# Altium PCB 3d Printer Control PCB.PcbDoc
Units mil, origin at the board's own origin, x right, y up, seen from the top; angles counter-clockwise.
Board outline 6000 x 4000 mil, 2 copper layers (Top Layer, Bottom Layer); 30 components, 35 nets, 131 pads, 45 vias.
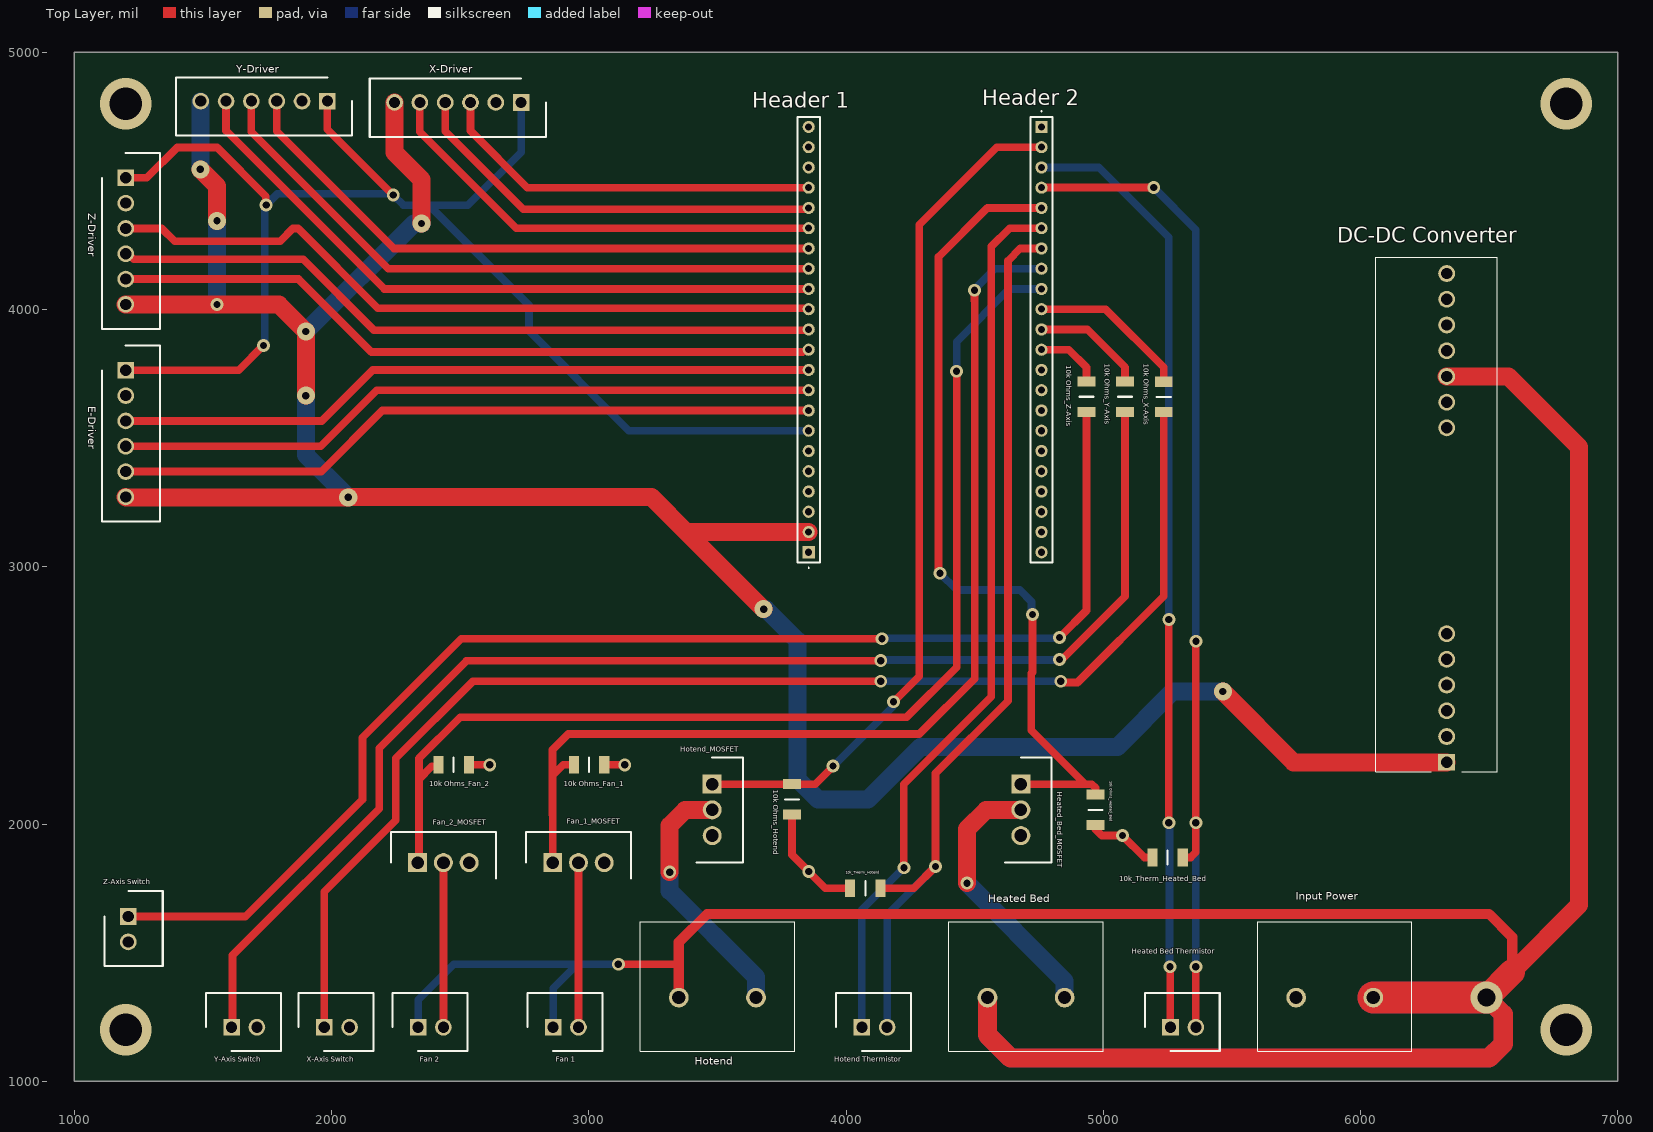
[diagram p0: Top Layer view]
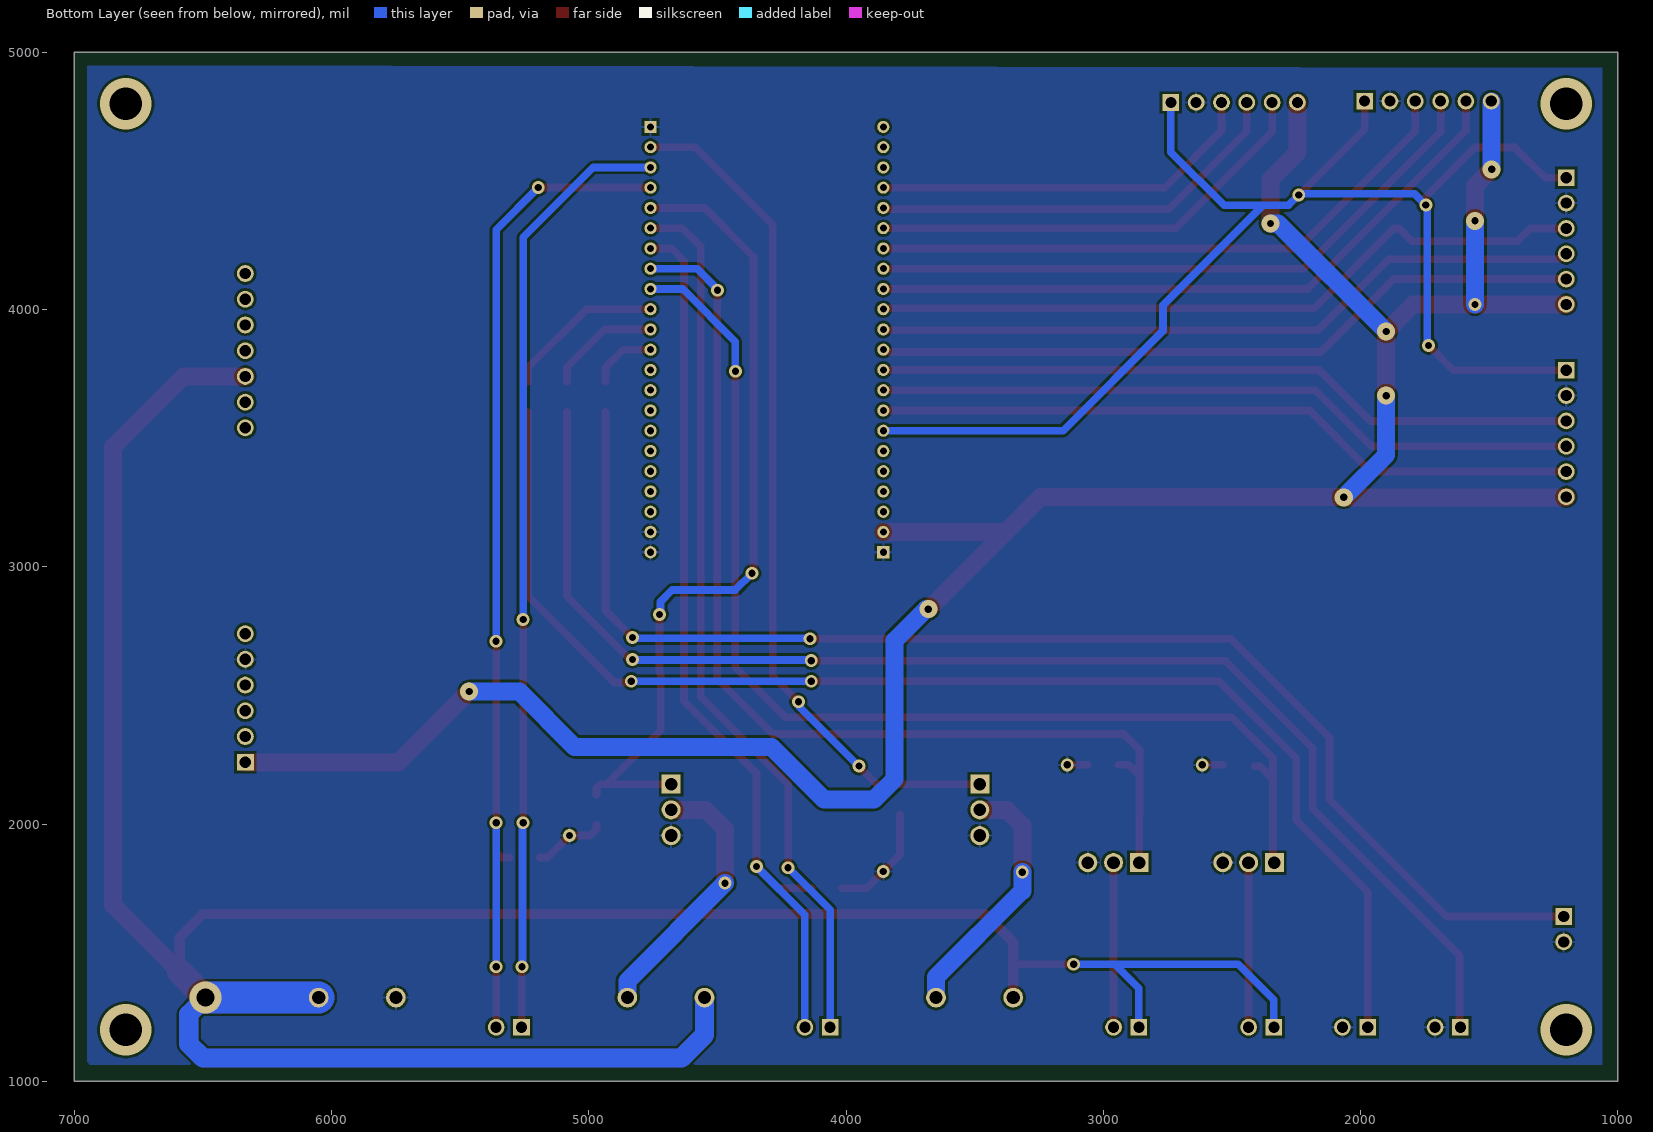
[diagram p1: Bottom Layer view, seen from below]
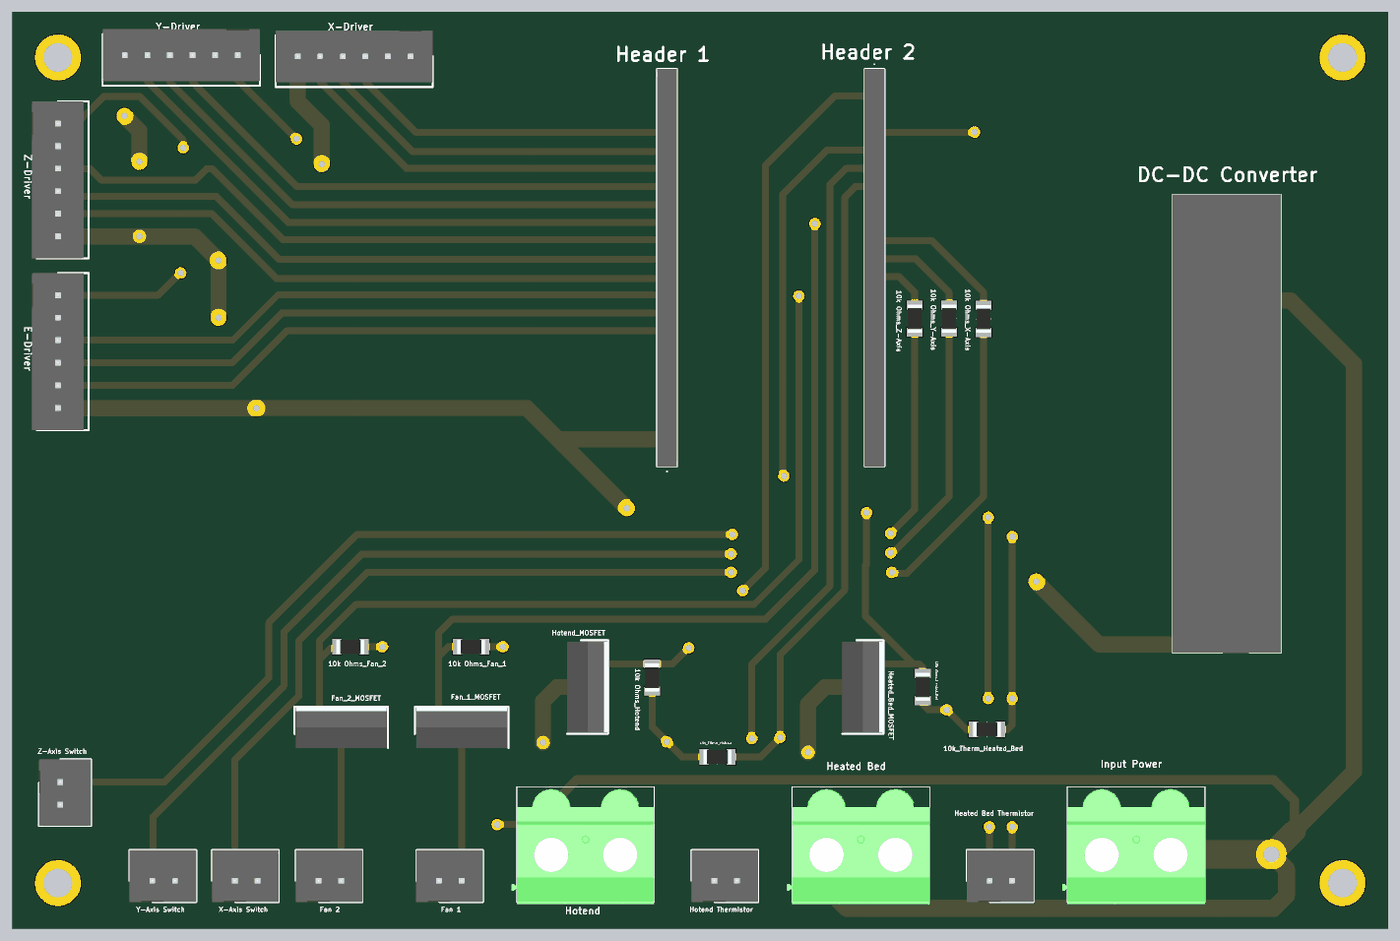
[diagram p2: 3D render of the assembled board from above, using the file's embedded part models]

## Layer stack, top to bottom
Top Solder: solder mask 0.4, Solder Resist, Dk 3.5
Top Layer: signal copper 1.4
Dielectric 1: dielectric 12.6, FR-4, Dk 4.8
Bottom Layer: signal copper 1.4
Bottom Solder: solder mask 0.4, Solder Resist, Dk 3.5

## Board outline
1000,1000 7000,1000 7000,5000 1000,5000

## Design rules (kind name [scope] priority, off if disabled: settings)
Clearance [All] p1: gap=10 ignorepadtopadclearanceinfootprint=FALSE
Height [All] p1: minheight=0 maxheight=99999 prefheight=0
HoleSize [All] p1: absolutevalues=TRUE maxlimit=200 minlimit=1 maxpercent=80.000 minpercent=20.000
PolygonConnect [All] p1: connectstyle=Relief reliefconductorwidth=10 reliefentries=4 polygonreliefangle="90 Angle" airgapwidth=10
RoutingVias [All] p1: holewidth=28 width=50 viastyle="Through Hole" minholewidth=28 minwidth=50 maxholewidth=28 maxwidth=50
SilkToSilkClearance [All] p1: silktosilkclearance=1
SolderMaskExpansion [All] p1: expansion=4 istentingtop=FALSE
Width [All] p1: maxlimit=125 minlimit=10 preferedwidth=10 minimp=50.000000 maximp=50.000000 favimp=50.000000
27 further rules are at their usual default settings.

## Classes and differential pairs
component class "U_Power Distribution": "DC-DC Converter"
component class "U_MCU Board": "10k Ohms_X-Axis" "10k Ohms_Y-Axis" "10k Ohms_Z-Axis" "Header 1" "Header 2"
component class "U_Hotend Fan 2": "10k Ohms_Fan_2" Fan_2_MOSFET
component class "U_Hotend Fan 1": "10k Ohms_Fan_1" Fan_1_MOSFET
component class "U_Hotend Controller": "10k Ohms_Hotend" Hotend_MOSFET
component class "U_Heated Bed Controller": "10k Ohms_Heated_Bed" Heated_Bed_MOSFET
component class "Overall Design": 10k_Therm_Heated_Bed 10k_THerm_Hotend E-Driver "Fan 1" "Fan 2" "Heated Bed" "Heated Bed Thermistor" Hotend "Hotend Thermistor" "Input Power" "X-Axis Switch" X-Driver "Y-Axis Switch" Y-Driver "Z-Axis Switch" Z-Driver

## Components (designator, comment, footprint, x,y, rotation, side; value= is the part's Value field where it differs from the comment)
"10k Ohms_Fan_1" "RC1206FR-7W10KL" RESC3116X65N 3000.94,2230 r180 top
"10k Ohms_Fan_2" "RC1206FR-7W10KL" RESC3116X65N 2475,2230 r180 top
"10k Ohms_Heated_Bed" "RC1206FR-7W10KL" RESC3116X65N 4970,2055 r90 top
"10k Ohms_Hotend" "RC1206FR-7W10KL" RESC3116X65N 3790,2095.94 r90 top
"10k Ohms_X-Axis" "RC1206FR-7W10KL" RESC3116X65N 5235,3660 r90 top
"10k Ohms_Y-Axis" "RC1206FR-7W10KL" RESC3116X65N 5085,3660.94 r90 top
"10k Ohms_Z-Axis" "RC1206FR-7W10KL" RESC3116X65N 4935,3660.94 r90 top
10k_Therm_Heated_Bed "RC1206FR-7W10KL" RESC3116X65N 5250,1870 r0 top
10k_THerm_Hotend "RC1206FR-7W10KL" RESC3116X65N 4075,1750 r0 top
"DC-DC Converter" "NID100-5" NID1005 6335,2240 r90 top
E-Driver "B6B-XH-A_LF__SN_" SHDR6W64P0X250_1X6_1740X575X700P 1200,3763.7 r270 top
"Fan 1" "B2B-XH-A_LF__SN_" SHDR2W64P0X250_1X2_740X575X700P 2861.57,1210 r0 top
"Fan 2" "B2B-XH-A_LF__SN_" SHDR2W64P0X250_1X2_740X575X700P 2336.57,1210 r0 top
Fan_1_MOSFET "IPP042N03L_G" TO254P457X1003X2115-3P 2860,1850 r0 top
Fan_2_MOSFET "IPP042N03L_G" TO254P457X1003X2115-3P 2335,1850 r0 top
"Header 1" "831-83-022-10-242101" 8318302210242101 3855,3056.46 r270 top
"Header 2" "831-83-022-10-242101" 8318302210242101 4760,4710 r90 top
"Heated Bed" "1732720" 1732720 4550,1325 r0 top
"Heated Bed Thermistor" "B2B-XH-A_LF__SN_" SHDR2W64P0X250_1X2_740X575X700P 5261.57,1210 r0 top
Heated_Bed_MOSFET "IPP042N03L_G" TO254P457X1003X2115-3P 4680,2155 r270 top
Hotend "1732720" 1732720 3350,1325 r0 top
"Hotend Thermistor" "B2B-XH-A_LF__SN_" SHDR2W64P0X250_1X2_740X575X700P 4061.57,1210 r0 top
Hotend_MOSFET "IPP042N03L_G" TO254P457X1003X2115-3P 3480,2155 r270 top
"Input Power" "1732720" 1732720 5750,1325 r0 top
"X-Axis Switch" "B2B-XH-A_LF__SN_" SHDR2W64P0X250_1X2_740X575X700P 1971.57,1210 r0 top
X-Driver "B6B-XH-A_LF__SN_" SHDR6W64P0X250_1X6_1740X575X700P 2737.13,4805 r180 top
"Y-Axis Switch" "B2B-XH-A_LF__SN_" SHDR2W64P0X250_1X2_740X575X700P 1611.57,1210 r0 top
Y-Driver "B6B-XH-A_LF__SN_" SHDR6W64P0X250_1X6_1740X575X700P 1983.7,4810 r180 top
"Z-Axis Switch" "B2B-XH-A_LF__SN_" SHDR2W64P0X250_1X2_740X575X700P 1210,1640 r270 top
Z-Driver "B6B-XH-A_LF__SN_" SHDR6W64P0X250_1X6_1740X575X700P 1200,4512.13 r270 top

## Footprints (in the part's own frame and the unit in brackets; to place one, negate y for a bottom-side part, rotate by r counter-clockwise, add the part's x,y. Pads: shape width x height; smd on the part's side, far side on the other; paste and mask are expansions set on the pad)
1732720 [mm]
  round 1.95 hole 1.3: 1(0,0) 2(7.62,0)
  silkscreen extent -3.81,-5.3 11.43,7.5, body extent -4.37,-5.55 11.44,7.25, height 18.83
8318302210242101 [mm]
  rect 1.2x1.2 hole 0.7: 1(0,0)
  round 1.2 hole 0.7: 2(-2,0) 3(-4,0) 4(-6,0) 5(-8,0) 6(-10,0) 7(-12,0) 8(-14,0) 9(-16,0) 10(-18,0) 11(-20,0) 12(-22,0) 13(-24,0) 14(-26,0) 15(-28,0) 16(-30,0) 17(-32,0) 18(-34,0) 19(-36,0) 20(-38,0) 21(-40,0) 22(-42,0)
  silkscreen extent -43,-1.1 1.6,1.1, body extent -43,-1.1 1,1.1, height 4.65
NID1005 [mm]
  rect 1.665x1.665 hole 1.11: 1(0,0)
  round 1.665 hole 1.11: 2(2.54,0) 3(5.08,0) 4(7.62,0) 5(10.16,0) 6(12.7,0) 7(33.02,0) 8(35.56,0) 9(38.1,0) 10(40.64,0) 11(43.18,0) 12(45.72,0) 13(48.26,0)
  silkscreen extent -0.94,-5 49.86,7, body extent -0.94,-5 49.86,7, height 27.6
RESC3116X65N [mm]
  rect 1x1.75 smd: 1(-1.5,0) 2(1.5,0)
  silkscreen extent 0,-0.7 0,0.7, body extent -1.55,-0.8 1.55,0.8, height 0.65
SHDR2W64P0X250_1X2_740X575X700P [mm]
  rect 1.65x1.65 hole 1.1: 1(0,0)
  round 1.65 hole 1.1: 2(2.5,0)
  silkscreen extent -2.54,-2.35 4.86,3.4, body extent -2.54,-2.35 4.86,3.4, height 7
SHDR6W64P0X250_1X6_1740X575X700P [mm]
  rect 1.65x1.65 hole 1.1: 1(0,0)
  round 1.65 hole 1.1: 2(2.5,0) 3(5,0) 4(7.5,0) 5(10,0) 6(12.5,0)
  silkscreen extent -2.45,-2.35 14.95,3.4, body extent -2.45,-2.88 14.95,2.88, height 7
TO254P457X1003X2115-3P [mm]
  rect 1.875x1.875 hole 1.25: 1(0,0)
  round 1.875 hole 1.25: 2(2.54,0) 3(5.08,0)
  silkscreen extent -2.64,-1.55 7.72,3.02, body extent -2.47,-1.55 7.55,3.02, height 20.18

## Part data
"10k Ohms_Fan_1" "10k Ohms_Fan_2" "10k Ohms_Heated_Bed" "10k Ohms_Hotend" "10k Ohms_X-Axis" "10k Ohms_Y-Axis" "10k Ohms_Z-Axis" 10k_Therm_Heated_Bed 10k_THerm_Hotend: "Resistor", Manufacturer_Name=KEMET, Arrow Part Number=RC1206FR-7W10KL, Arrow Price/Stock=https://www.arrow.com/en/products/rc1206fr-7w10kl/yageo, Datasheet Link=https://datasheet.datasheetarchive.com/originals/distributors/Datasheets_SAMA/902f9e387b938f871d31120f5fc1d65e.pdf, Height=0.65mm, Manufacturer_Part_Number=RC1206FR-7W10KL
"DC-DC Converter": "Power Supply", Manufacturer_Name="Mean Well", Mouser Part Number=709-NID100-5, Arrow Part Number=NID100-5, Arrow Price/Stock=https://www.arrow.com/en/products/nid100-5/mean-well-enterprises?region=nac, Datasheet Link=https://www.meanwell-web.com/content/files/pdfs/productPdfs/MW/NID100/NID100-spec.pdf, Height=27.5mm, Manufacturer_Part_Number=NID100-5, Mouser Price/Stock=https://www.mouser.co.uk/ProductDetail/MEAN-WELL/NID100-5?qs=u16ybLDytRY%252BLs2ghdXN4Q%3D%3D
E-Driver X-Driver Y-Driver Z-Driver: "Connector", Arrow Part Number=B6B-XH-A(LF)(SN), Manufacturer_Name="JST (JAPAN SOLDERLESS TERMINALS)", Arrow Price/Stock=https://www.arrow.com/en/products/b6b-xh-a-lf-sn/jst-manufacturing?region=europe, Datasheet Link=https://datasheet.lcsc.com/szlcsc/JST-Sales-America-B6B-XH-A-LF-SN_C144397.pdf, Height=7mm, Manufacturer_Part_Number=B6B-XH-A(LF)(SN)
"Fan 1" "Fan 2" "Heated Bed Thermistor" "Hotend Thermistor" "X-Axis Switch" "Y-Axis Switch" "Z-Axis Switch": "Connector", Arrow Part Number=B2B-XH-A(LF)(SN), Manufacturer_Name="JST (JAPAN SOLDERLESS TERMINALS)", Arrow Price/Stock=https://www.arrow.com/en/products/b2b-xh-a-lf-sn/jst-manufacturing?region=europe, Datasheet Link=http://www.jst-mfg.com/product/pdf/eng/eXH.pdf, Height=7mm, Manufacturer_Part_Number=B2B-XH-A(LF)(SN)
Fan_1_MOSFET Fan_2_MOSFET Heated_Bed_MOSFET Hotend_MOSFET: "MOSFET (N-Channel)", Manufacturer_Name=Infineon, Manufacturer_Part_Number="IPP042N03L G", Mouser Part Number=726-IPP042N03LG, Datasheet Link=https://www.infineon.com/dgdl/Infineon-IPP042N03L-DS-v02_00-en.pdf?fileId=db3a30432313ff5e01239ec50f64709d, Height=4.57mm, Mouser Price/Stock=https://www.mouser.co.uk/ProductDetail/Infineon-Technologies/IPP042N03L-G?qs=mzcOS1kGbgcoiRIwFnG3QQ%3D%3D
"Header 1" "Header 2": "Connector", Manufacturer_Name=Preci-Dip, Datasheet Link=https://www.precidip.com/AppHost/9696,1/Scripts/Modules/Catalog/Default.aspx?c=7&i=195&p=78&pdf=1&dsku=831-PP-NNN-10-242101, Height=4.55mm, Manufacturer_Part_Number=831-83-022-10-242101
"Heated Bed" Hotend "Input Power": "Connector", Manufacturer_Name="Phoenix Contact", Mouser Part Number=651-1732720, Arrow Part Number=1732720, Arrow Price/Stock=https://www.arrow.com/en/products/1732720/phoenix-contact, Datasheet Link=https://media.digikey.com/pdf/Data%20Sheets/Phoenix%20Contact%20PDFs/1732720.pdf, Height=18mm, Manufacturer_Part_Number=1732720, Mouser Price/Stock=https://www.mouser.co.uk/ProductDetail/Phoenix-Contact/1732720?qs=DAHzmYU9cu2maJEX8AM1Kg%3D%3D

## Via types
v1: diameter 50, hole 28, Top Layer to Bottom Layer, 32 vias
v2: diameter 70, hole 28, Top Layer to Bottom Layer, 8 vias
v3: diameter 200, hole 125, Top Layer to Bottom Layer, 4 vias
v4: diameter 125, hole 70, Top Layer to Bottom Layer, 1 vias

## Nets (pads, with @x,y where several pads share a name; then routed paths per layer and width w, separated by ;. In a path a pad name is that pad's centre, name@x,y a point inside that pad or via, vN(x,y) a via of type N, cw(c..) or ccw(c..) an arc to the next point about the centre after c; other vN are vias at no path point)
GND: 10k_Therm_Heated_Bed.1 10k_THerm_Hotend.1 "10k Ohms_Fan_1.1" "10k Ohms_Fan_2.1" "10k Ohms_Heated_Bed.1" "10k Ohms_Hotend.1" "DC-DC Converter.5" "Header 1.1" "Header 2.1" "Header 2.21" "Header 2.22" "Input Power.1" "X-Axis Switch.2" "Y-Axis Switch.2" "Z-Axis Switch.2" E-Driver.2 Fan_1_MOSFET.3 Fan_2_MOSFET.3 Heated_Bed_MOSFET.3 Hotend_MOSFET.3 X-Driver.2 Y-Driver.2 Z-Driver.2 | length 884.5
  Top Layer w10: 2534.06,2230 2535,2229.06 ; 3855,3056.46 3856.46,3055 ; 4759.27,3055.73 4760,3056.46
  Top Layer w30: 2534.06,2230 v1(2615,2230) ; 3060,2230 v1(3140,2230) ; 3790,2036.89 3790,1880 3920,1750 10k_THerm_Hotend.1 ; 4970,1995.94 4970,1980 4995,1955 v1(5075,1955) 5160,1870 10k_Therm_Heated_Bed.1
  other v1: 3855,1815
"Net10k Ohms_Fan_1_2": "10k Ohms_Fan_1.2" "Header 2.8" Fan_1_MOSFET.1 | length 4102.8
  Top Layer w10: 2859.14,2035.95 2860,2035.1
  Top Layer w30: 2859.14,2035.95 2859.14,2189.14 ; Fan_1_MOSFET.1 2860,2035.1 ; 2941.89,2230 2941.37,2230.52 2900.52,2230.52 2859.14,2189.14 ; v1(4500,4075) 4499.5,4074.5 4499.5,4035.5 4500,4035 4500,2565 4285,2350 2920,2350 2859.14,2289.14 2859.14,2189.14
  Bottom Layer w30: v1(4500,4075) 4500,4080 4578.82,4158.82 4760,4158.82
"Net10k Ohms_Fan_2_2": "10k Ohms_Fan_2.2" "Header 2.9" Fan_2_MOSFET.1 | length 4422.8
  Top Layer w10: Fan_2_MOSFET.1 Fan_2_MOSFET.1@2340,1855 ; 2410.94,2225 2415.94,2230
  Top Layer w30: Fan_2_MOSFET.1@2340,1855 2340,2175 ; 2410.94,2225 2390,2225 2340,2175 ; v1(4430,3760) 4430,2610 4235,2415 2500,2415 2340,2255 2340,2175
  Bottom Layer w30: v1(4430,3760) 4430,3875 4635.08,4080.08 4760,4080.08
"Net10k Ohms_Heated_Bed_2": "10k Ohms_Heated_Bed.2" "Header 2.5" Heated_Bed_MOSFET.1 | length 3234.6
  Top Layer w10: v1@4360,2980 v1(4365,2975)
  Top Layer w30: v1@4360,2980 4360,4205 4550.04,4395.04 4760,4395.04 ; Heated_Bed_MOSFET.1 4930,2155 ; v1(4725,2815) 4725,2589.79 4720,2584.79 4720,2365 4930,2155 ; 4970,2114.06 4970,2140 4955,2155 4930,2155
  Bottom Layer w30: v1(4365,2975) 4430,2910 4675,2910 4721.17,2863.83 4721.17,2818.83 v1(4725,2815)
"Net10k Ohms_Hotend_2": "10k Ohms_Hotend.2" "Header 2.2" Hotend_MOSFET.1 | length 3348.3
  Top Layer w10: v1@3950,2219.29 v1(3950,2225)
  Top Layer w30: Hotend_MOSFET.1 3790,2155 3880,2155 v1(3950,2225) ; v1(4185,2475) 4285,2575 4285,4330 4586.26,4631.26 4760,4631.26
  Bottom Layer w30: v1(3950,2225) 4181.17,2456.17 4181.17,2471.17 v1(4185,2475)
"Net10k Ohms_X-Axis_1": "10k Ohms_X-Axis.1" "X-Axis Switch.1" | length 5126.4
  Top Layer w10: v1(4835,2555) v1@4840,2550
  Top Layer w30: 1971.57,1210 1971.57,1736.57 2250,2015 2250,2255 2550,2555 v1(4135,2555) ; v1@4840,2550 4900,2550 5235,2885 5235,3600.94
  Bottom Layer w30: v1(4135,2555) v1(4835,2555)
"Net10k Ohms_X-Axis_2": "10k Ohms_X-Axis.2" "Header 2.10" | length 624.7
  Top Layer w30: 4760,4001.34 5008.66,4001.34 5235,3775 5235,3719.06
"Net10k Ohms_Y-Axis_1": "10k Ohms_Y-Axis.1" "Y-Axis Switch.1" | length 5183.8
  Top Layer w10: 1611.57,1210 1615,1213.43 ; v1(4830,2640) v1@4840,2640
  Top Layer w30: 1615,1213.43 1615,1490 2185,2060 2185,2295 2525,2635 v1(4135,2635) ; v1@4840,2640 5085,2885 5085,3601.89
  Bottom Layer w10: v1(4135,2635) v1@4137.5,2637.5 ; v1@4827.5,2637.5 v1(4830,2640)
  Bottom Layer w30: v1@4137.5,2637.5 v1@4827.5,2637.5
"Net10k Ohms_Y-Axis_2": "10k Ohms_Y-Axis.2" "Header 2.11" | length 441.1
  Top Layer w30: 4760,3922.6 4937.4,3922.6 5085,3775 5085,3720
"Net10k Ohms_Z-Axis_1": "10k Ohms_Z-Axis.1" "Z-Axis Switch.1" | length 5132.7
  Top Layer w30: 1210,1640 1665,1640 2120,2095 2120,2335 2505,2720 v1(4140,2720) ; v1(4830,2725) 4836.45,2731.45 4836.62,2731.45 4935,2829.83 4935,3601.89
  Bottom Layer w10: 1210,1640 1211.57,1641.57
  Bottom Layer w30: v1(4140,2720) 4142.5,2722.5 4827.5,2722.5 v1(4830,2725)
"Net10k Ohms_Z-Axis_2": "10k Ohms_Z-Axis.2" "Header 2.12" | length 258.5
  Top Layer w30: 4760,3843.86 4866.14,3843.86 4935,3775 4935,3720
Net10k_Therm_Heated_Bed_1: 
Net10k_Therm_Heated_Bed_2: 10k_Therm_Heated_Bed.2 "Header 2.4" "Heated Bed Thermistor.2" | length 3943.2
  Top Layer w10: 4760,4473.78 4760.31,4474.09 ; v1@5195.84,4474.09 v1(5196.16,4474.41)
  Top Layer w30: 4760.31,4474.09 v1@5195.84,4474.09 ; 10k_Therm_Heated_Bed.2 5340,1870 5360,1890 v1(5360,2005) 5360,2710 v1(5360.36,2710.36) ; 5360,1210 v1(5360,1445)
  Bottom Layer w30: v1(5196.16,4474.41) 5360,4310.56 5360,2710.71 v1(5360.36,2710.36) ; v1(5360,1445) v1(5360,2005)
Net10k_THerm_Hotend_2: 10k_THerm_Hotend.2 "Header 2.7" "Hotend Thermistor.2" | length 3573.6
  Top Layer w30: 10k_THerm_Hotend.2 4263.35,1750 v1(4348.13,1834.78) 4348.13,2196.87 4630,2478.74 4630,4190 4677.56,4237.56 4760,4237.56
  Bottom Layer w30: 4160,1210 4160,1646.65 v1(4348.13,1834.78)
"NetDC-DC Converter_1": "DC-DC Converter.1" "Header 1.2" E-Driver.6 X-Driver.6 Y-Driver.6 Z-Driver.6 | length 10125.7
  Top Layer w10: 3385,3130 3390.2,3135.2 ; 3849.8,3130 3855,3135.2
  Top Layer w70: E-Driver.6 1201.57,3270 v2(2065,3270) 2066.57,3271.57 3243.43,3271.57 3385,3130 v2(3680,2835) ; Z-Driver.6 v1(1555,4020) 1795,4020 v2(1900,3915) v2(1900,3665) ; v2(1490,4545) 1555,4480 v2(1555,4345) ; X-Driver.6 2245,4610 2350,4505 v2(2350,4335) ; 3390.2,3135.2 3855,3135.2 ; v2(5465,2515) 5740,2240 6335,2240
  Bottom Layer w10: v2(1490,4545) v2@1490.79,4545.79 ; Y-Driver.6@1490.79,4809.21 Y-Driver.6 ; v2@2044.22,3282.86 2052.14,3282.86 v2(2065,3270)
  Bottom Layer w70: v2@1490.79,4545.79 Y-Driver.6@1490.79,4809.21 ; v1(1555,4020) v2(1555,4345) ; v2(1900,3665) 1900,3435 v2@2052.14,3282.86 ; v2(1900,3915) 2320,4335 v2(2350,4335) ; v2(3680,2835) 3688.52,2835 3810.5,2713.02 3810.5,2175.5 3891.01,2095 4085,2095 4290,2300 5055,2300 5270,2515 v2(5465,2515)
"NetDC-DC Converter_9": "DC-DC Converter.9" "Fan 1.1" "Fan 2.1" "Heated Bed.1" "Input Power.2" Hotend.1 | length 13767.9
  Top Layer w10: 3345,1455 3350,1450
  Top Layer w30: v1(3115,1455) 3345,1455
  Top Layer w40: Hotend.1 3350,1450 3350,1540 3460,1650 6500,1650 6590,1560 6590,1425
  Top Layer w70: 6335,3740 6575,3740 6850,3465 6850,1685 6590,1425
  Top Layer w75: 4550,1325 4550,1180 4640,1090 6500,1090 6555,1145 6555,1260 v4(6490,1325)
  Top Layer w100: v4(6490,1325) 6590,1425
  Top Layer w125: 6050,1325 v4(6490,1325)
  Bottom Layer w30: 2336.57,1210 2336.57,1316.57 2475,1455 2955,1455 ; 2861.57,1210 2861.57,1361.57 2955,1455 ; v1(3115,1455) 2955,1455
  Bottom Layer w75: 4550,1325 4550,1180 4640,1090 6500,1090 6555,1145 6555,1260 v4(6490,1325)
  Bottom Layer w125: 6050,1325 v4(6490,1325)
NetE-Driver_1: "Header 1.7" E-Driver.1 X-Driver.1 Y-Driver.1 Z-Driver.1 | length 5507.1
  Top Layer w10: v1@1744.82,4407.12 v1(1745.91,4406.03)
  Top Layer w30: E-Driver.1 1638.7,3763.7 v1(1735,3860) ; Z-Driver.1 1282.13,4512.13 1400,4630 1555,4630 1744.82,4440.18 v1@1744.82,4407.12 ; Y-Driver.1 1983.7,4701.3 v1(2240,4445)
  Bottom Layer w10: v1(1735,3860) v1@1740.46,3865.46
  Bottom Layer w30: v1@1740.46,3865.46 1740.46,4400.58 v1(1745.91,4406.03) 1789.88,4450 2235,4450 v1(2240,4445) 2280,4405 2378.99,4405 ; X-Driver.1 2737.13,4612.13 2530,4405 2378.99,4405 ; 3855,3528.9 3156.1,3528.9 2767.55,3917.45 2767.55,4016.45 2378.99,4405
NetE-Driver_3: "Header 1.10" E-Driver.3 | length 2737.1
  Top Layer w30: E-Driver.3 1961.85,3566.85 2160.12,3765.12 3855,3765.12
NetE-Driver_4: "Header 1.9" E-Driver.4 | length 2745.3
  Top Layer w30: E-Driver.4 1958.43,3468.43 2176.38,3686.38 3855,3686.38
NetE-Driver_5: "Header 1.8" E-Driver.5 | length 2753.4
  Top Layer w30: E-Driver.5 1960,3370 2197.64,3607.64 3855,3607.64
"NetFan 1_2": "Fan 1.2" Fan_1_MOSFET.2 | length 640
  Top Layer w30: 2960,1210 Fan_1_MOSFET.2
"NetFan 2_2": "Fan 2.2" Fan_2_MOSFET.2 | length 640
  Top Layer w30: 2435,1210 Fan_2_MOSFET.2
"NetHeader 1_11": "Header 1.11" Z-Driver.5 | length 2776.1
  Top Layer w10: 3830.52,3835 3832.25,3836.73 3847.87,3836.73 3855,3843.86
  Top Layer w30: Z-Driver.5 1871.57,4118.43 2155,3835 3830.52,3835
"NetHeader 1_12": "Header 1.12" Z-Driver.4 | length 2779
  Top Layer w10: 3852.4,3920 3855,3922.6
  Top Layer w30: Z-Driver.4 1209.46,4216.85 1231.31,4195 1890,4195 2165,3920 3852.4,3920
"NetHeader 1_13": "Header 1.13" Z-Driver.3 | length 2826.7
  Top Layer w10: 3851.34,4005 3855,4001.34
  Top Layer w30: Z-Driver.3 1200.28,4315 1340,4315 1390,4265 1800,4265 1850.28,4315.28 1869.72,4315.28 2180,4005 3851.34,4005
"NetHeader 1_14": "Header 1.14" Y-Driver.5 | length 2634.7
  Top Layer w30: Y-Driver.5 1590,4695 2204.92,4080.08 3855,4080.08
"NetHeader 1_15": "Header 1.15" Y-Driver.4 | length 2505.7
  Top Layer w30: Y-Driver.4 1688.43,4691.57 2221.18,4158.82 3855,4158.82
"NetHeader 1_16": "Header 1.16" Y-Driver.3 | length 2373.7
  Top Layer w30: Y-Driver.3 1786.85,4693.15 2242.44,4237.56 3855,4237.56
"NetHeader 1_17": "Header 1.17" X-Driver.5 | length 1780.4
  Top Layer w30: X-Driver.5 2343.43,4691.57 2718.7,4316.3 3855,4316.3
"NetHeader 1_18": "Header 1.18" X-Driver.4 | length 1652.7
  Top Layer w10: 3849.96,4390 3855,4395.04
  Top Layer w30: X-Driver.4 2441.85,4693.15 2745,4390 3849.96,4390
"NetHeader 1_19": "Header 1.19" X-Driver.3 | length 1516.5
  Top Layer w30: X-Driver.3 2540.28,4694.72 2761.22,4473.78 3855,4473.78
"NetHeader 2_3": "Header 2.3" "Heated Bed Thermistor.1" | length 3685.5
  Top Layer w10: 5260,1211.57 5261.57,1210
  Top Layer w30: v1(5255,2005) v1(5255,2795) v1@5258.48,2791.52 ; 5260,1211.57 v1(5260,1445)
  Bottom Layer w10: v1(5255,2005) v1@5257.5,2002.5 ; v1@5257.5,1447.5 v1(5260,1445)
  Bottom Layer w30: 4760,4552.52 4982.48,4552.52 5254.7,4280.3 5254.7,2795.3 v1(5255,2795) ; v1@5257.5,1447.5 v1@5257.5,2002.5
"NetHeader 2_6": "Header 2.6" "Hotend Thermistor.1" | length 3468.1
  Top Layer w30: v1(4225,1830) 4225,2155 4565,2495 4565,4245 4636.3,4316.3 4760,4316.3
  Bottom Layer w30: 4061.57,1210 4061.57,1666.57 v1(4225,1830)
"NetHeated Bed_2": "Heated Bed.2" Heated_Bed_MOSFET.2 | length 1053.5
  Top Layer w70: v1(4470,1770) 4470,1980 4545,2055 Heated_Bed_MOSFET.2
  Bottom Layer w70: v1(4470,1770) 4850,1390 4850,1325
NetHotend_2: Hotend.2 Hotend_MOSFET.2 | length 998.9
  Top Layer w70: v1(3314.65,1812.7) 3314.65,1994.65 3375,2055 Hotend_MOSFET.2
  Bottom Layer w70: v1(3314.65,1812.7) 3314.65,1740.35 3650,1405 Hotend.2
pads on no net: "DC-DC Converter.2" "DC-DC Converter.3" "DC-DC Converter.4" "DC-DC Converter.6" "DC-DC Converter.7" "DC-DC Converter.8" "DC-DC Converter.10" "DC-DC Converter.11" "DC-DC Converter.12" "DC-DC Converter.13" "Header 1.3" "Header 1.4" "Header 1.5" "Header 1.6" "Header 1.20" "Header 1.21" "Header 1.22" "Header 2.13" "Header 2.14" "Header 2.15" "Header 2.16" "Header 2.17" "Header 2.18" "Header 2.19" "Header 2.20"
copper on no net:
  other v3: 1200,1200 6800,1200 1200,4800 6800,4800

## Polygon pours and split planes (outlines as drawn)
GND on Bottom Layer "GND_L02_P000" (solid, pour order 0): 1060,4940 1060,1065 6940,1065 6950,1075 6950,4950